# Altium PCB UPS.PcbDoc
Units mm, origin at the board's own origin, x right, y up, seen from the top; angles counter-clockwise.
Board outline 300.74 x 165.61 mm, 2 copper layers (Top Layer, Bottom Layer); 183 components, 101 nets, 505 pads, 1 vias.
Unrouted connection lines stored in the file: 369.
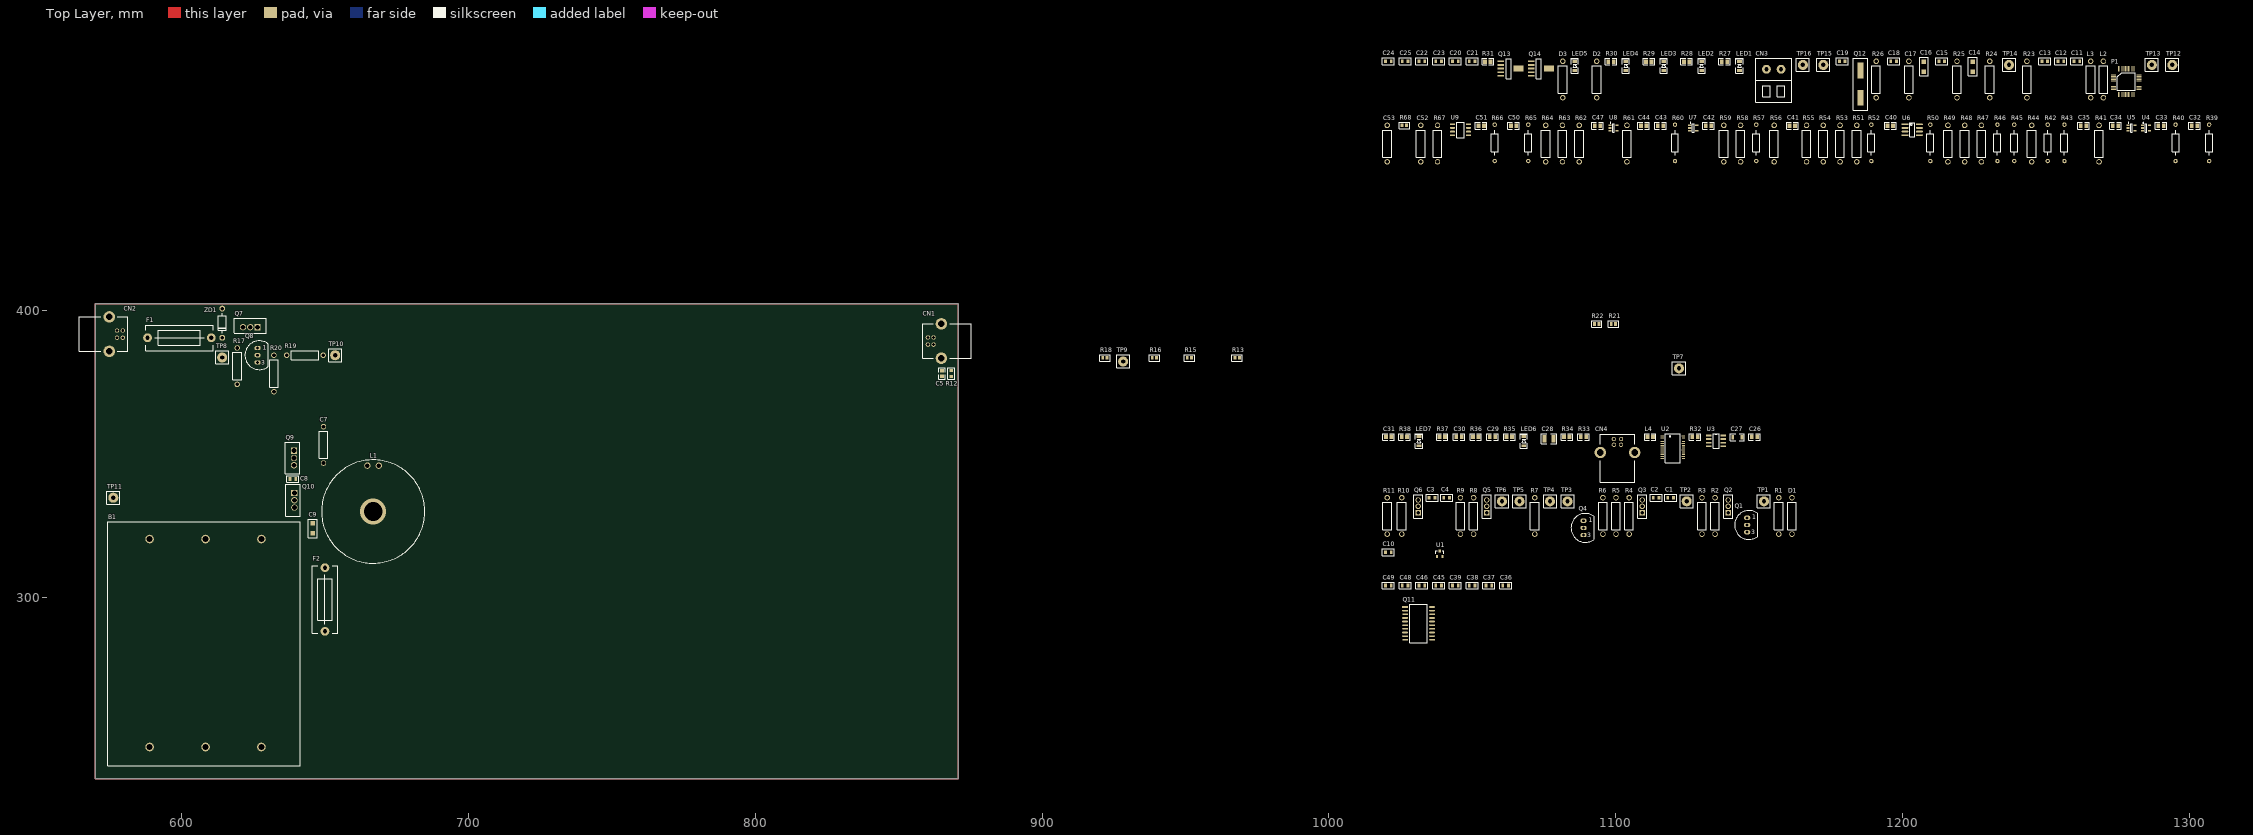
[diagram p0: Top Layer view]
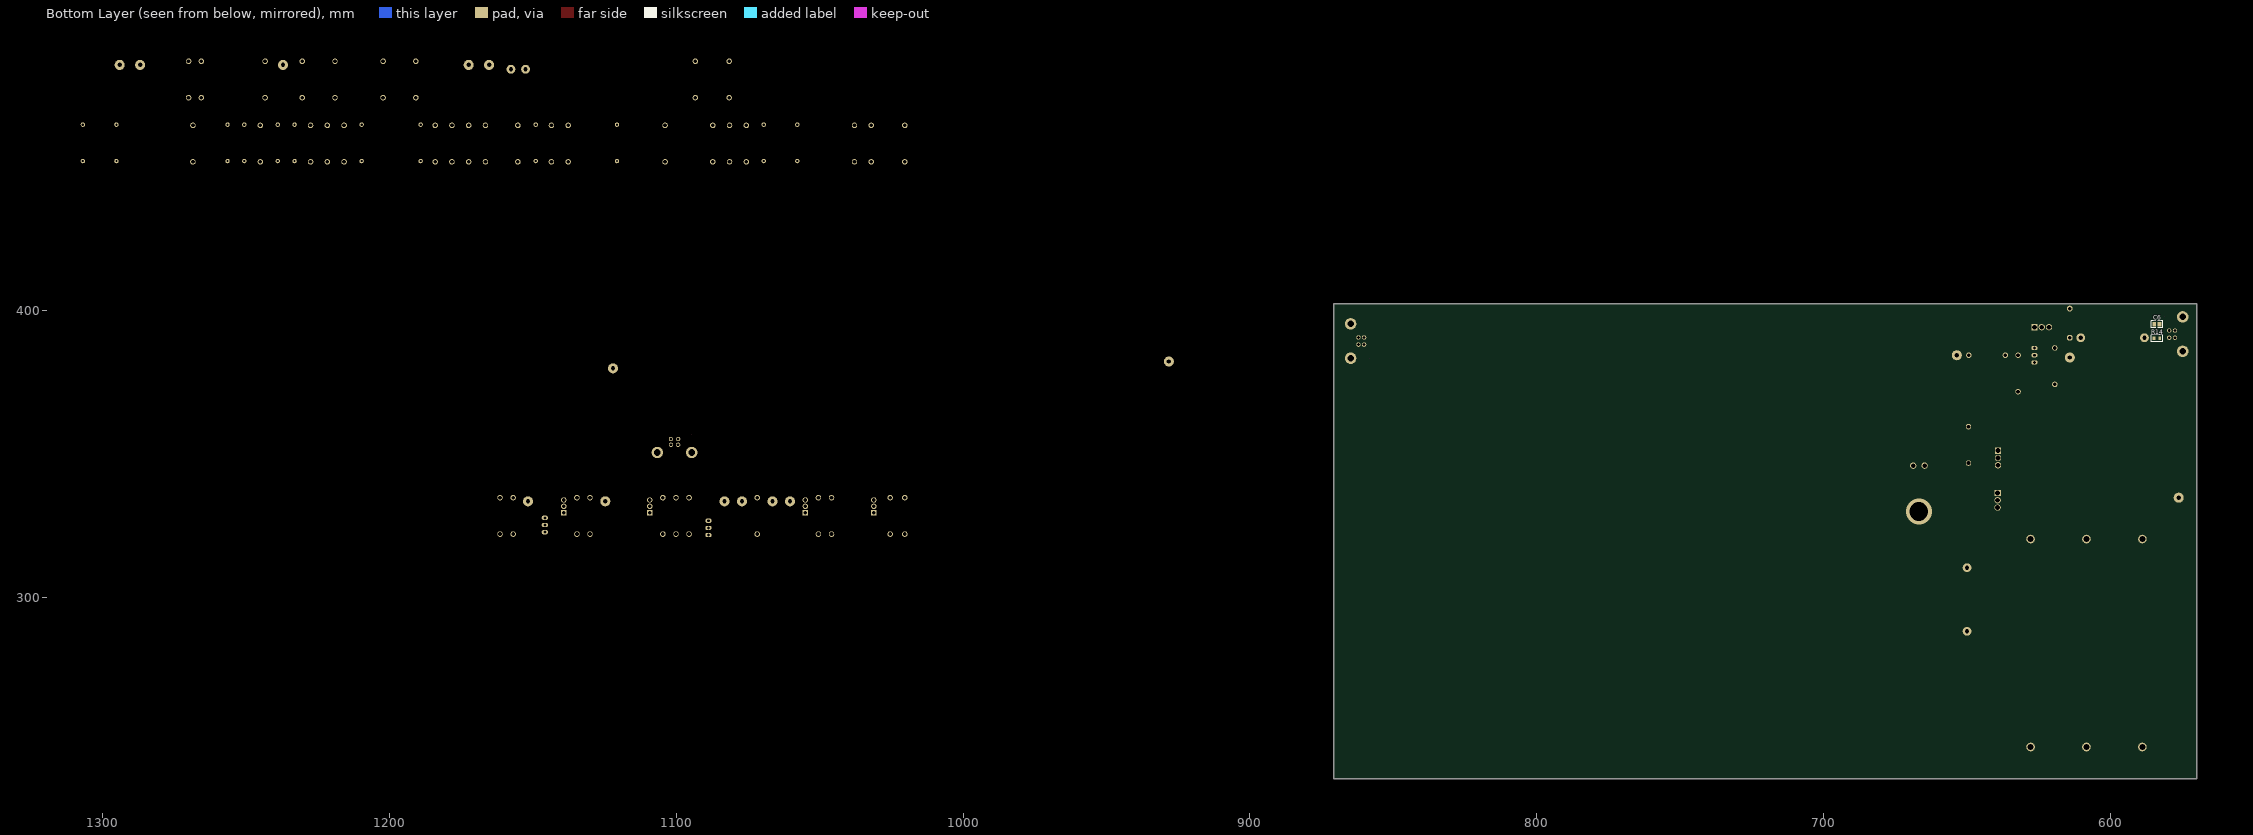
[diagram p1: Bottom Layer view, seen from below]

## Layer stack, top to bottom
Top Solder: solder mask 0.0102, Solder Resist, Dk 3.5
Top Layer: signal copper 0.0356
Dielectric 1: dielectric 0.32, FR-4, Dk 4.8
Bottom Layer: signal copper 0.0356
Bottom Solder: solder mask 0.0102, Solder Resist, Dk 3.5

## Board outline
569.976,236.601 569.976,402.209 870.712,402.209 870.712,236.601

## Design rules (kind name [scope] priority, off if disabled: settings)
Clearance Clearance_poly [All vs InPolygon] p1: gap=0.5
Clearance [All] p2: gap=0.25
HoleSize [All] p1: absolutevalues=TRUE maxlimit=8 minlimit=0.3 maxpercent=80.000 minpercent=20.000
MinimumAnnularRing [All] p1: minimumring=0.2
MinimumSolderMaskSliver [All] p1: minsoldermaskwidth=0.2
PlaneClearance [All] p1: clearance=1.5
PlaneConnect [All] p1: planeconnectstyle=Relief reliefexpansion=0.5 reliefentries=4 reliefconductorwidth=0.3 reliefairgap=0.5
PolygonConnect PolygonConnect_3 [All vs IsNamedPolygon('U14_cooler_top') Or  IsNamedPolygon('U14_cooler_bottom')] p1: connectstyle=Direct reliefconductorwidth=0.254 reliefentries=4 polygonreliefangle="90 Angle" airgapwidth=0.254
PolygonConnect PolygonConnect_2 [All vs IsNamedPolygon('U13_cooler_bottom')] p2: connectstyle=Direct reliefconductorwidth=0.254 reliefentries=4 polygonreliefangle="90 Angle" airgapwidth=0.254
PolygonConnect PolygonConnect_1 [All vs IsNamedPolygon('U13_cooler_top')] p3: connectstyle=Direct reliefconductorwidth=0.254 reliefentries=4 polygonreliefangle="90 Angle" airgapwidth=0.254
PolygonConnect [All] p4: connectstyle=Relief reliefconductorwidth=0.3 reliefentries=4 polygonreliefangle="90 Angle" airgapwidth=0.5
RoutingVias [All] p1: holewidth=0.7 width=1.27 viastyle="Through Hole" minholewidth=0.7 minwidth=1.27 maxholewidth=1 maxwidth=1.5
SilkToBoardRegionClearance [Hide='False'] p1 off:
SilkToSilkClearance [All] p1 off: silktosilkclearance=0.254
SilkToSolderMaskClearance [IsPad] p1 off: minsilkscreentomaskgap=0.254 clearancetoexposedcopper=TRUE
SolderMaskExpansion [All] p1: expansion=0.02
Width [All] p1: maxlimit=5 minlimit=0.254 preferedwidth=0.254
23 further rules are at their usual default settings.

## Classes and differential pairs
component class Processor: C11 C12 C13 C14 C15 C16 C17 C18 C19 C20 C21 C22 C23 C24 C25 CN3 D2 D3 L2 L3 LED1 LED2 LED3 LED4 LED5 P1 Q12 Q13 Q14 R23 R24 R25 R26 R27 R28 R29 R30 R31 TP12 TP13 TP14 TP15 TP16
component class Mérések: *1 C32 C33 C34 C35 C36 C37 C38 C39 C40 C41 C42 C43 C44 C45 C46 C47 C48 C49 C50 C51 C52 C53 R39 R40 R41 R42 R43 R44 R45 R46 R47 R48 R49 R50 R51 R52 R53 R54 R55 R56 R57 R58 R59 R60 R61 R62 R63 R64 R65 R66 R67 R68 U4 U5 U6 U7 U8
component class Fokör: B1 C5 C6 C7 C8 C9 CN1 CN2 F1 F2 L1 Q7 Q8 Q9 Q10 R12 R13 R14 R15 R16 R17 R18 R19 R20 R21 R22 TP7 TP8 TP9 TP10 TP11 ZD1
component class FTDI: C26 C27 C28 C29 C30 C31 CN4 L4 LED6 LED7 R32 R33 R34 R35 R36 R37 R38 U2 U3
component class "Fet meghajtó": C1 C2 C3 C4 D1 Q1 Q2 Q3 Q4 Q5 Q6 R1 R2 R3 R4 R5 R6 R7 R8 R9 R10 R11 TP1 TP2 TP3 TP4 TP5 TP6
component class "Buffer driver": C10 Q11 U1

## Components (designator, comment, footprint, x,y, rotation, side; value= is the part's Value field where it differs from the comment)
B1 "BAT" Elemtarto_3rekesz 577.85,244.729 r0 top
C1 "100nF" FP_0805_CAP_085 1119.124,334.645 r0 top
C2 "100nF" FP_0805_CAP_085 1114.044,334.645 r0 top
C3 "100nF" FP_0805_CAP_085 1035.939,334.645 r0 top
C4 "100nF" FP_0805_CAP_085 1041.019,334.645 r0 top
C5 "4n7 50V X7R" 0805_C 865.124,377.952 r270 top
C6 "4n7 50V X7R" 0805_C 583.819,395.097 r0 bottom
C7 "5600uF" AXIAL-0.3 649.478,353.06 r270 top
C8 "10uF" FP_0805_CAP_085 638.81,341.122 r180 top
C9 "47uF" FP_1206_CAP_125 645.795,323.977 r270 top
C10 "100nF" FP_0805_CAP_085 1020.699,315.595 r0 top
C11 "100nF" FP_0805_CAP_085 1260.729,486.791 r0 top
C12 "10uF" FP_0805_CAP_085 1255.141,486.791 r0 top
C13 "10uF" FP_0805_CAP_085 1249.553,486.791 r0 top
C14 "1u2" FP_1206_CAP_125 1224.407,484.886 r90 top
C15 "100nF" FP_0805_CAP_085 1213.612,486.791 r0 top
C16 "1u2" FP_1206_CAP_125 1207.389,484.886 r90 top
C17 "1nF" AXIAL-0.3 1202.182,480.441 r90 top
C18 "22pF" FP_0805_CAP_085 1196.848,486.791 r0 top
C19 "22pF" FP_0805_CAP_085 1178.941,486.791 r0 top
C20 "100nF" FP_0805_CAP_085 1044.067,486.791 r0 top
C21 "1uF" FP_0805_CAP_085 1049.909,486.791 r0 top
C22 "10uF" FP_0805_CAP_085 1032.383,486.791 r0 top
C23 "10uF" FP_0805_CAP_085 1038.225,486.791 r0 top
C24 "10nF" FP_0805_CAP_085 1020.699,486.791 r0 top
C25 "10nF" FP_0805_CAP_085 1026.541,486.791 r0 top
C26 "100nF 50V" 0805_C 1148.334,355.854 r0 top
C27 "10uF 25V" 1206_C 1142.365,355.727 r0 top
C28 "10nF 10% 25V X7R" 1210_C 1076.706,355.219 r0 top
C29 "100nF 50V" 0805_C 1057.021,355.854 r0 top
C30 "4n7 50V X7R" 0805_C 1045.337,355.854 r0 top
C31 "100nF 50V" 0805_C 1020.826,355.854 r0 top
C32 "330pF 50V NP0" 0805_C 1301.75,464.312 r0 top
C33 "330pF 50V NP0" 0805_C 1290.066,464.312 r0 top
C34 "100nF 50V" 0805_C 1274.191,464.312 r0 top
C35 "100nF 50V" 0805_C 1263.015,464.312 r0 top
C36 "1n 50V NP0" FP_0805_CAP_085 1061.593,304.038 r0 top
C37 "1n 50V NP0" FP_0805_CAP_085 1055.751,304.038 r0 top
C38 "1n 50V NP0" FP_0805_CAP_085 1049.909,304.038 r0 top
C39 "1n 50V NP0" FP_0805_CAP_085 1044.067,304.038 r0 top
C40 "330pF 50V NP0" 0805_C 1195.705,464.312 r0 top
C41 "330pF 50V NP0" 0805_C 1161.542,464.312 r0 top
C42 "330pF 50V NP0" 0805_C 1132.332,464.312 r0 top
C43 "330pF 50V NP0" 0805_C 1115.568,464.312 r0 top
C44 "100nF 50V" 0805_C 1109.726,464.312 r0 top
C45 "1n 50V NP0" FP_0805_CAP_085 1038.225,304.038 r0 top
C46 "1n 50V NP0" FP_0805_CAP_085 1032.383,304.038 r0 top
C47 "100nF 50V" 0805_C 1093.597,464.312 r0 top
C48 "1n 50V NP0" FP_0805_CAP_085 1026.541,304.038 r0 top
C49 "1n 50V NP0" FP_0805_CAP_085 1020.699,304.038 r0 top
C50 "330pF 50V NP0" 0805_C 1064.387,464.312 r0 top
C51 "330pF 50V NP0" 0805_C 1053.084,464.312 r0 top
C52 "100nF" AXIAL-0.3 1032.002,458.089 r90 top
C53 "500pF" AXIAL-0.3 1020.318,458.089 r90 top
CN1 "USB-B-04PFHTW" USB-B 860.171,389.255 r90 top
CN2 "USB-B-04PFHTW" USB-B 579.501,391.668 r270 top
CN3 "Dugos Sorkapocs 2" "Dugos_sorkapocs 2" 1152.525,483.997 r0 top
CN4 "USB-B-04PFHTW" USB-B 1100.582,355.092 r0 top
D1 "1N5819" AXIAL-0.3 1161.415,328.295 r90 top
D2 "1N5819" AXIAL-0.3 1093.343,480.441 r90 top
D3 "1N5819" AXIAL-0.3 1081.532,480.441 r90 top
F1 "3A \"F\"" BIZTOSITO_5X20 610.362,390.398 r180 top
F2 "5A \"F\"" BIZTOSITO_5X20 649.986,288.036 r90 top
L1 "86uH" toroid 668.782,345.821 r180 top
L2 "10uH" AXIAL-0.3 1270,480.441 r90 top
L3 "10uH" AXIAL-0.3 1265.555,480.441 r90 top
L4 "220ohm/100MHz, 0.08R (2A)" 0805_R 1112.012,355.854 r0 top
LED1 "RED" 1206_LED_R 1143.127,485.14 r90 top
LED2 "GRE" 1206_LED_G 1129.919,485.14 r90 top
LED3 "RED" 1206_LED_R 1116.711,485.14 r90 top
LED4 "GRE" 1206_LED_G 1103.503,485.14 r90 top
LED5 "GRE" 1206_LED_G 1085.723,485.14 r90 top
LED6 "RED" 1206_LED_R 1067.943,354.33 r90 top
LED7 "GRE" 1206_LED_G 1031.367,354.33 r90 top
P1 "TMS320F28027" S-PQFP48 1277.874,479.806 r0 top
Q1 "BC556" TO-92 1145.794,325.12 r0 top
Q2 "BD139" TO-32 1139.19,329.438 r90 top
Q3 "BD140" TO-32 1109.218,329.438 r90 top
Q4 "BC546" TO-92 1088.771,324.104 r0 top
Q5 "BD139" TO-32 1054.989,329.438 r90 top
Q6 "BD140" TO-32 1031.113,329.438 r90 top
Q7 "IRF9530N" TO-220-AB 626.491,394.081 r180 top
Q8 "BC546" TO-92 626.491,384.302 r0 top
Q9 "IRL7833" TO-220-AB 639.191,351.028 r270 top
Q10 "IRL7833" TO-220-AB 639.318,336.296 r270 top
Q11 "SN74LVC244A" SOP20 1026.541,296.545 r0 top
Q12 "HC49/4HSMX" Crystal_10MHz 1185.291,478.79 r90 top
Q13 "TPS73633DCQR" TPS73633 1059.942,484.251 r0 top
Q14 "TPS73633DCQR" TPS73633 1070.483,484.251 r0 top
R1 "1K" AXIAL-0.3 1156.843,328.295 r90 top
R2 "1K5" AXIAL-0.3 1134.618,328.295 r90 top
R3 "2" AXIAL-0.3 1130.046,328.295 r90 top
R4 "10K" AXIAL-0.3 1104.646,328.295 r90 top
R5 "1K" AXIAL-0.3 1100.074,328.295 r90 top
R6 "2K2" AXIAL-0.3 1095.502,328.295 r90 top
R7 "10K" AXIAL-0.3 1071.753,328.295 r90 top
R8 "2K2" AXIAL-0.3 1050.417,328.295 r90 top
R9 "2" AXIAL-0.3 1045.845,328.295 r90 top
R10 "10K" AXIAL-0.3 1025.398,328.295 r90 top
R11 "10K" AXIAL-0.3 1020.318,328.295 r90 top
R12 "1M" FP_0805_RES 868.299,377.952 r90 top
R13 "0" FP_0805_0ohm 967.994,383.413 r0 top
R14 "1M" FP_0805_RES 583.819,390.271 r180 bottom
R15 "0" FP_0805_0ohm 951.357,383.413 r0 top
R16 "0" FP_0805_0ohm 939.165,383.413 r0 top
R17 "10K" AXIAL-0.3 619.379,380.492 r270 top
R18 "0" FP_0805_0ohm 921.893,383.413 r0 top
R19 "2K2" AXIAL-0.3 643.001,384.302 r180 top
R20 "10K" AXIAL-0.3 632.206,377.952 r90 top
R21 "0" FP_0805_0ohm 1099.185,395.224 r0 top
R22 "0" FP_0805_0ohm 1093.343,395.224 r0 top
R23 "3K3" AXIAL-0.3 1243.33,480.441 r90 top
R24 "3K3" AXIAL-0.3 1230.376,480.441 r90 top
R25 "100K" AXIAL-0.3 1218.946,480.441 r90 top
R26 "1M" AXIAL-0.3 1190.752,480.441 r90 top
R27 "390R" 0805_R 1137.92,486.664 r0 top
R28 "390R" 0805_R 1124.712,486.664 r0 top
R29 "390R" 0805_R 1111.504,486.664 r0 top
R30 "390R" 0805_R 1098.296,486.664 r0 top
R31 "390R" 0805_R 1055.37,486.664 r0 top
R32 "4K70 5%" 0805_R 1127.633,355.854 r0 top
R33 "33R0 5%" 0805_R 1088.771,355.854 r0 top
R34 "33R0 5%" 0805_R 1082.929,355.854 r0 top
R35 "390R" 0805_R 1062.863,355.854 r0 top
R36 "10K0  1%" 0805_R 1051.179,355.854 r0 top
R37 "1M" 0805_R 1039.495,355.854 r0 top
R38 "390R" 0805_R 1026.287,355.854 r0 top
R39 "3k3 1%" RES_AXIAL_D95_L250_RM500 1306.83,458.343 r90 top
R40 "3k3 1%" RES_AXIAL_D95_L250_RM500 1295.146,458.343 r90 top
R41 "5K6" AXIAL-0.3 1268.476,458.089 r90 top
R42 "2k7 1%" RES_AXIAL_D95_L250_RM500 1250.569,458.343 r90 top
R43 "1K8 1%" RES_AXIAL_D95_L250_RM500 1256.411,458.343 r90 top
R44 "5K6" AXIAL-0.3 1244.981,458.089 r90 top
R45 "2k7 1%" RES_AXIAL_D95_L250_RM500 1238.885,458.343 r90 top
R46 "1k8 1%" RES_AXIAL_D95_L250_RM500 1233.043,458.343 r90 top
R47 "3K3" AXIAL-0.3 1227.455,458.089 r90 top
R48 "2K5" AXIAL-0.3 1221.613,458.089 r90 top
R49 "10K" AXIAL-0.3 1215.771,458.089 r90 top
R50 "3k3 1%" RES_AXIAL_D95_L250_RM500 1209.675,458.343 r90 top
R51 "3K" AXIAL-0.3 1184.021,458.089 r90 top
R52 "3k3 1%" RES_AXIAL_D95_L250_RM500 1189.101,458.343 r90 top
R53 "3K3" AXIAL-0.3 1178.179,458.089 r90 top
R54 "3K3" AXIAL-0.3 1172.337,458.089 r90 top
R55 "2K7" AXIAL-0.3 1166.495,458.089 r90 top
R56 "10K" AXIAL-0.3 1155.192,458.089 r90 top
R57 "3k3 1%" RES_AXIAL_D95_L250_RM500 1148.969,458.343 r90 top
R58 "3K3" AXIAL-0.3 1143.508,458.089 r90 top
R59 "3K3" AXIAL-0.3 1137.666,458.089 r90 top
R60 "10K" RES_AXIAL_D95_L250_RM500 1120.648,458.343 r90 top
R61 "5K6" AXIAL-0.3 1103.884,458.089 r90 top
R62 "5K6" AXIAL-0.3 1087.247,458.089 r90 top
R63 "5K" AXIAL-0.3 1081.405,458.089 r90 top
R64 "5K" AXIAL-0.3 1075.563,458.089 r90 top
R65 "3k3 1%" RES_AXIAL_D95_L250_RM500 1069.467,458.343 r90 top
R66 "10K" RES_AXIAL_D95_L250_RM500 1057.783,458.343 r90 top
R67 "3K3" AXIAL-0.3 1037.844,458.089 r90 top
R68 "0" FP_0805_0ohm 1026.287,464.439 r0 top
TP1 "Testpoint" TESTPOINT_1.5 1151.636,333.375 r0 top
TP2 "Testpoint" TESTPOINT_1.5 1124.712,333.375 r0 top
TP3 "Testpoint" TESTPOINT_1.5 1083.183,333.375 r0 top
TP4 "Testpoint" TESTPOINT_1.5 1077.087,333.375 r0 top
TP5 "Testpoint" TESTPOINT_1.5 1066.419,333.375 r0 top
TP6 "Testpoint" TESTPOINT_1.5 1060.323,333.375 r0 top
TP7 "Testpoint" TESTPOINT_1.5 1122.045,379.73 r0 top
TP8 "Testpoint" TESTPOINT_1.5 614.172,383.54 r0 top
TP9 "Testpoint" TESTPOINT_1.5 928.243,382.143 r0 top
TP10 "Testpoint" TESTPOINT_1.5 653.542,384.302 r0 top
TP11 "Testpoint" TESTPOINT_1.5 576.199,334.645 r0 top
TP12 "Testpoint" TESTPOINT_1.5 1294.003,485.521 r0 top
TP13 "Testpoint" TESTPOINT_1.5 1286.891,485.521 r0 top
TP14 "Testpoint" TESTPOINT_1.5 1237.107,485.521 r0 top
TP15 "Testpoint" TESTPOINT_1.5 1172.337,485.521 r0 top
TP16 "Testpoint" TESTPOINT_1.5 1165.225,485.521 r0 top
U1 "MCP120" "SOT-23 - 3" 1038.606,315.087 r0 top
U2 "FT232RL" SSOP-28 1119.886,351.917 r0 top
U3 "USB6B1" SO-8 1134.999,354.457 r0 top
U4 "FAN4174IS5X" SOT-23-5 1284.859,463.55 r0 top
U5 "FAN4174IS5X" SOT-23-5 1279.779,463.55 r0 top
U6 "LM2903D" FP_SO8_MS012AA 1203.325,462.915 r0 top
U7 "FAN4174IS5X" SOT-23-5 1126.998,463.55 r0 top
U8 "FAN4174IS5X" SOT-23-5 1099.185,463.55 r0 top
U9 "ASC711" SOP8 1043.051,464.82 r0 top
ZD1 "BZX85C5V6" DO-41-400 614.172,390.398 r90 top

## Footprints (in the part's own frame and the unit in brackets; to place one, negate y for a bottom-side part, rotate by r counter-clockwise, add the part's x,y. Pads: shape width x height; smd on the part's side, far side on the other; paste and mask are expansions set on the pad)
0805_C [mm]
  rect 1.3x1.5 smd: 1(-0.95,0) 2(0.95,0)
  silkscreen extent -2,-1.15 2,1.15, body extent -1,-0.68 1,0.67, height 0.55
0805_R [mm]
  rect 1.3x1.5 smd: 1(-0.95,0) 2(0.95,0)
  silkscreen extent -2,-1.15 2,1.15, body extent -1,-0.67 1,0.68, height 0.55
1206_C [mil]
  rect 40x65 smd: 1(-62.5,0) 2(62.5,0)
  silkscreen extent -98,-49 98,49, body extent -61,-32 61,32, height 25
1206_LED_G [mil]
  rect 40x65 smd: 1(-62.5,0) 2(62.5,0)
  silkscreen extent -98,-49 105,49, body extent -63,-33 63,33, height 45
1206_LED_R [mil]
  rect 40x65 smd: 1(-62.5,0) 2(62.5,0)
  silkscreen extent -98,-49 105,49, body extent -63,-33 63,33, height 45
1210_C [mm]
  rect 1.4x2.7 smd: 1(-1.5,0) 2(1.5,0)
  silkscreen extent -2.67,-1.78 2.67,1.78, body extent -1.6,-1.25 1.6,1.25, height 1.3
AXIAL-0.3 [mm] "Axial Device, Thru-Hole; 2 Leads; 0.3 in Pin Spacing"
  round 1.9 hole 1.3: 1(-6.35,0) 2(6.35,0)
  silkscreen extent -4.83,-1.52 4.72,1.52
BIZTOSITO_5X20 [mil]
  round 120 hole 60: 1(0,0) 2(875,0)
  silkscreen extent -25,-175 900,175
Crystal_10MHz [mm]
  rect 5.5x2 smd: 1(-4.75,0) 2(4.75,0)
  silkscreen extent -9,-2.5 9,2.5
DO-41-400 [mil]
  round 80 hole 48: 1(400,0) 2(0,0)
  silkscreen extent 63,-53 335,53, body extent -17,-53 417,55, height 129
"Dugos_sorkapocs 2" [mil]
  round 120 hole 60: 1(0,0) 2(200,0)
  silkscreen extent -150,-450 350,150
Elemtarto_3rekesz [mm]
  round 3 hole 2: 1(11,3) 2(30.5,3) 3(50,3) 4(11,75.5) 5(30.5,75.5) 6(50,75.5)
  silkscreen extent -3.5,-3.5 63.5,81.5
FP_0805_0ohm [mm] "0805 power inductor"
  rect 1x1.3 smd: 1(-0.762,0) 2(0.762,0)
  silkscreen extent -1.81,-1.2 1.81,1.13, body extent -1,-0.64 1.03,0.64, height 1.25
FP_0805_CAP_085 [mm] "0805 kapacitás YAGEO 0.85mm magas"
  rect 1x1.3 smd: 1(-1,0) 2(1,0)
  silkscreen extent -2.07,-1.19 2.08,1.16, body extent -1,-0.64 1.03,0.64, height 0.85
FP_0805_RES [mm] "0805 ellenállás"
  rect 1x1.3 smd: 1(-1,0) 2(1,0)
  silkscreen extent -2.03,-1.2 2.06,1.19, body extent -1,-0.62 1,0.63, height 0.62
FP_1206_CAP_125 [mm] "1206 kapacitás 1.25 mm"
  rect 1.6x1.6 smd: 1(-1.7,0) 2(1.7,0)
  silkscreen extent -3.19,-1.57 3.23,1.46, body extent -1.52,-0.79 1.58,0.79, height 1.25
FP_SO8_MS012AA [mm] "SO8 JEDEC MS-012AA, Analog Devices R-8, SO8-SOT96-1, NS M08A"
  rect 2.4x0.6 smd: 1(-2.5,1.905)
  oval 2.4x0.6 smd: 2(-2.5,0.635) 3(-2.5,-0.635) 4(-2.5,-1.905) 5(2.5,-1.905) 6(2.5,-0.635) 7(2.5,0.635) 8(2.5,1.905)
  silkscreen extent -0.9,-2.5 0.9,2.5, body extent -3.03,-2.5 3.03,2.5, height 1.9
RES_AXIAL_D95_L250_RM500 [mil] "Ellenállás D = 2.4 mm  Testhossz = 6.3 mm  Raszter = 12.7 mm"
  round 60 hole 32: 1(-250,0) 2(250,0)
  silkscreen extent -170,-48 170,48
S-PQFP48 [mm]
  oval 0.22x1.8 smd: 1(-2.67,-4.6)
  rect 0.22x1.8 smd: 2(-2.17,-4.6) 3(-1.67,-4.6) 4(-1.17,-4.6) 5(-0.67,-4.6) 6(-0.17,-4.6) 7(0.33,-4.6) 8(0.83,-4.6) 9(1.33,-4.6) 10(1.83,-4.6) 11(2.33,-4.6) 12(2.83,-4.6) 25(2.83,4.4) 26(2.33,4.4) 27(1.83,4.4) 28(1.33,4.4) 29(0.83,4.4) 30(0.33,4.4) 31(-0.17,4.4) 32(-0.67,4.4) 33(-1.17,4.4) 34(-1.67,4.4) 35(-2.17,4.4) 36(-2.67,4.4)
  rect 1.8x0.22 smd: 13(4.58,-2.85) 14(4.58,-2.35) 15(4.58,-1.85) 16(4.58,-1.35) 17(4.58,-0.85) 18(4.58,-0.35) 19(4.58,0.15) 20(4.58,0.65) 21(4.58,1.15) 22(4.58,1.65) 23(4.58,2.15) 24(4.58,2.65) 37(-4.42,2.65) 38(-4.42,2.15) 39(-4.42,1.65) 40(-4.42,1.15) 41(-4.42,0.65) 42(-4.42,0.15) 43(-4.42,-0.35) 44(-4.42,-0.85) 45(-4.42,-1.35) 46(-4.42,-1.85) 47(-4.42,-2.35) 48(-4.42,-2.85)
  silkscreen extent -2.99,-3.17 3.14,2.96, body extent -4.44,-4.61 4.58,4.41, height 1.45
SO-8 [mm]
  rect 1.905x0.635 smd: 1(-2.54,1.905) 2(-2.54,0.635) 3(-2.54,-0.635) 4(-2.54,-1.905) 5(2.54,-1.905) 6(2.54,-0.635) 7(2.54,0.635) 8(2.54,1.905)
  silkscreen extent -1,-2.54 1.1,2.54, body extent -3,-2.45 3,2.45, height 1.75
SOP8 [mm]
  rect 1.75x0.65 smd: 1(0,0)
  oval 1.75x0.65 smd: 2(0,-1.27) 3(0,-2.54) 4(0,-3.81) 5(5.6,-3.81) 6(5.6,-2.54) 7(5.6,-1.27) 8(5.6,0)
  silkscreen extent 1.55,-4.62 4.16,0.75
SOP20 [mm]
  rect 2x0.6 smd: 1(0,0)
  oval 2x0.6 smd: 2(0,-1.27) 3(0,-2.54) 4(0,-3.81) 5(0,-5.08) 6(0,-6.35) 7(0,-7.62) 8(0,-8.89) 9(0,-10.16) 10(0,-11.43) 11(9.4,-11.43) 12(9.4,-10.16) 13(9.4,-8.89) 14(9.4,-7.62) 15(9.4,-6.35) 16(9.4,-5.08) 17(9.4,-3.81) 18(9.4,-2.54) 19(9.4,-1.27) 20(9.4,0)
  silkscreen extent 1.56,-12.45 7.81,1.03, body extent -0.51,-12.11 9.81,0.69, height 2.49
"SOT-23 - 3" [mil]
  rect 32x42 smd: 1(-37.4,-40) 2(37.4,-40) 3(0,40)
  silkscreen extent -52,0 52,40, body extent -57,-46 58,46, height 39
SOT-23-5 [mm] "SOT23, 5-Leads, Texas Instruments"
  rect 1.1x0.6 smd: 1(-1.2,0.95) 2(-1.2,0) 3(-1.2,-0.95) 4(1.2,-0.95) 5(1.2,0.95)
  silkscreen extent -1.13,-1.5 0.28,1.9, body extent -1.17,-1.46 1.14,1.46, height 0.98
SSOP-28 [mm] "FTDI Chip"
  oval 1.2x0.3 smd: 1(-3.7,4.225) 2(-3.7,3.575) 3(-3.7,2.925) 4(-3.7,2.275) 5(-3.7,1.625) 6(-3.7,0.975) 7(-3.7,0.325) 8(-3.7,-0.325) 9(-3.7,-0.975) 10(-3.7,-1.625) 11(-3.7,-2.275) 12(-3.7,-2.925) 13(-3.7,-3.575) 14(-3.7,-4.225) 15(3.7,-4.225) 16(3.7,-3.575) 17(3.7,-2.925) 18(3.7,-2.275) 19(3.7,-1.625) 20(3.7,-0.975) 21(3.7,-0.325) 22(3.7,0.325) 23(3.7,0.975) 24(3.7,1.625) 25(3.7,2.275) 26(3.7,2.925) 27(3.7,3.575) 28(3.7,4.225)
  silkscreen extent -2.6,-5.1 2.6,5.1
TESTPOINT_1.5 [mm] "2mm-es tesztpont 1mm-es furattal"
  round 3.5 hole 1.5: 1(0,0)
  silkscreen extent -2.29,-2.29 2.29,2.29, body extent -1.13,-1.13 1.13,1.13
TO-32 [mm]
  rect 1.9x1.9 hole 1.3: 1(0,0)
  round 1.9 hole 1.3: 2(2.2,0) 3(4.4,0)
  silkscreen extent -1.95,-1.55 6.17,1.58
TO-92 [mm] "TO, Flat Index; 3 In-Line, Axial Leads; Body Dia. 4.6mm; Leads 0.41 x 0.39 mm (max)"
  oval 2.2x1.5 hole 1: 1(0,2.5) 2(0,0) 3(0,-2.5)
  silkscreen extent -4.4,-4.99 3.51,5.01
TO-220-AB [mm] "TO, Thru-Hole, Vertical, Heatsink Mounted; 3 In-Line Leads; Pitch 3.81 mm"
  rect 2.2x2.2 hole 1.7: 1(0,0)
  round 2.2 hole 1.7: 2(2.54,0) 3(5.08,0)
  silkscreen extent -2.95,-3.06 8.06,2.05, body extent -2.71,-2.85 7.79,1.85, height 2.25
toroid [mm]
  round 2.2 hole 1.5: 1(0,0) 2(4,0)
  silkscreen extent -16,-2 20,34
TPS73633 [mm]
  rect 2.2x0.6 smd: 1(0,2.54) 2(0,1.27) 3(0,0) 4(0,-1.27) 5(0,-2.54)
  rect 3.5x2.2 smd: 6(6.2,0)
  silkscreen extent 1.86,-3.56 3.59,3.48
USB-B [mm]
  round 4 hole 2.3: 0(-6,-4.7) 0(6,-4.7)
  round 1.5 hole 1: 1(1.25,0) 2(-1.25,0) 3(-1.25,-2) 4(1.25,-2)
  Top Layer lines w0.2: -6,1.7 -6,1.7
  silkscreen extent -6,-15.1 6,1.7, body extent -7.44,-15 7.44,2, height 11

## Part data
C1 C2 C3 C4 C7 C8 C9 C10 C11 C12 C13 C14 C15 C16 C17 C18 C19 C20 C21 C22 C23 C24 C25 C52 C53: library part CAP, "Capacitor"
C5 C6 C26 C27 C28 C29 C30 C31 C32 C33 C34 C35 C40 C41 C42 C43 C44 C47 C50 C51: library part Capacitor_SMD, "SMD kondenzátorok"
C36 C37 C38 C39 C45 C46 C48 C49: library part Capacitor
CN1 CN2 CN4: library part USB-B
CN3: "2 P RM5.08 90° ZÁRT 12A"
D1 D2 D3: library part SCHOTTKY, "NXP - PMEG3020EJ,115 - SCHOTTKY RECT 30V 2A SOD323F"
F1 F2: library part Fuse, "Fuse"
L1 L2 L3: library part IND, "Inductor"
L4: library part "Ferrit Bead", "SMD Ferrit Bead 220ohm/100MHz"
LED1 LED2 LED3 LED4 LED5 LED6 LED7: library part LED, "LED"
P1: "Processor"
Q1 Q3 Q6: "PNP tranzisztor"
Q2 Q4 Q5 Q8: "NPN tranzisztor"
Q7: "P-MOSFET"
Q9 Q10: "N-FET"
Q12: "kristály"
Q13 Q14: "proci táp 3V3"
R1 R2 R3 R4 R5 R6 R7 R8 R9 R10 R11 R12 R13 R14 R15 R16 R17 R18 R19 R20 R21 R22 R23 R24 R25 R26 R41 R44 R47 R48 R49 R51 R53 R54 R55 R56 R58 R59 R61 R62 R63 R64 R67 R68: library part RES, "Resistor"
R27 R28 R29 R30 R31 R32 R33 R34 R35 R36 R37 R38 R39 R40 R42 R43 R45 R46 R50 R52 R57 R60 R65 R66: library part Resistor
U1: "Voltage detector"
U2: "USB - UART IC"
U6: "komparátor"
U9: "Áramméro"
ZD1: "Zener Diode 5V6 1.3W DO-41"

## Via types
v1: diameter 9, hole 6.5, Top Layer to Bottom Layer, 1 vias

## Nets (pads, with @x,y where several pads share a name; then routed paths per layer and width w, separated by ;. In a path a pad name is that pad's centre, name@x,y a point inside that pad or via, vN(x,y) a via of type N, cw(c..) or ccw(c..) an arc to the next point about the centre after c; other vN are vias at no path point)
GND: C3.1 C4.1 C5.2 C6.2 C7.2 C8.1 C9.1 C10.1 C11.1 C12.1 C13.1 C14.1 C15.2 C16.1 C17.1 C18.1 C19.1 C20.1 C21.1 C22.1 C23.1 C24.1 C25.1 C26.2 C27.2 C29.2 C30.2 C31.2 C32.2 C33.2 C34.1 C35.1 C36.1 C37.2 C38.1 C39.2 C42.2 C43.2 C44.1 C45.1 C46.2 C47.1 C48.1 C49.2 C52.2 C53.1 CN1.4 CN2.4 P1.2 P1.12 P1.33 P1.34 P1.44 Q4.3 Q6.2 Q8.3 Q10.3 Q11.3 Q11.5 Q11.7 Q11.8 Q11.9 Q11.10 Q11.11 Q11.12 Q11.13 Q11.15 Q11.17 Q13.3 Q13.6 Q14.3 Q14.6 R7.1 R10.1 R11.1 R12.1 R13.1 R14.1 R18.1 R20.1 R23.2 R24.1 R27.1 R28.1 R29.1 R30.1 R31.1 R36.1 R37.2 R39.1 R40.1 R51.1 R53.1 R57.1 R58.1 R59.1 R60.1 R68.1 U1.3 U2.7 U2.18 U2.21 U2.25 U2.26 U3.5 U4.2 U5.2 U6.4 U7.2 U8.2 U9.8 ZD1.1
NetB1_1: B1.1 B1.2 B1.3 R22.1
NetC1_1: C1.1 C2.1 L1.1 Q3.2 Q9.3 Q10.2 R4.1 R5.1 TP4.1
NetC5_1: C5.1 CN1.0 R12.2
NetC6_1: C6.1 CN2.0 R14.2
NetC7_1: C7.1 C8.2 CN1.1 D1.2 Q7.3 Q9.2 R15.2 TP7.1
NetC9_2: C9.2 F2.2 U9.3 U9.4
NetC11_2: C11.2 C12.2 L2.2 P1.35
NetC14_2: C14.2 P1.32
NetC16_2: C16.2 P1.43
NetC17_2: C17.2 P1.3 R25.1
NetC18_2: C18.2 P1.46 Q12.2 R26.2
NetC19_2: C19.2 P1.45 Q12.1 R26.1
NetC24_2: C24.2 Q13.4
NetC25_2: C25.2 Q14.4
NetC28_1: C28.1 CN4.1 L4.1
NetC30_1: C30.1 CN4.0 R37.1
NetC32_1: C32.1 C36.2 R39.2 R41.2 U4.3
NetC33_1: C33.1 R40.2 R42.1 U5.3
NetC37_1: C37.1 C40.1 R44.2 R50.2 U4.4
NetC38_2: C38.2 R42.2 R43.1
NetC39_1: C39.1 R45.2 R46.1
NetC40_2: C40.2 P1.10 R48.2 R50.1 U4.1
NetC41_1: C41.1 R45.1 R52.2 U5.4
NetC41_2: C41.2 P1.9 R52.1 R55.2 U5.1
NetC42_1: C42.1 C45.2 R57.2 R61.2 U7.3
NetC43_1: C43.1 C48.2 R60.2 R63.1 U8.3
NetC46_1: C46.1 C50.1 R62.2 R65.2 U7.4
NetC49_1: C49.1 C51.1 R64.1 R66.2 U8.4
NetC50_2: C50.2 P1.8 R65.1 U7.1
NetC51_2: C51.2 P1.7 R66.1 U8.1
NetC53_2: C53.2 R63.2 U9.6
NetCN2_1: CN2.1 F1.2
NetCN3_1: CN3.1 P1.22 TP15.1
NetCN3_2: CN3.2 P1.23 TP16.1
NetL1_2: L1.2 U9.1 U9.2
NetLED1_1: LED1.1 P1.36
NetLED1_2: LED1.2 R27.2
NetLED2_1: LED2.1 P1.19
NetLED2_2: LED2.2 R28.2
NetLED3_1: LED3.1 P1.20
NetLED3_2: LED3.2 R29.2
NetLED4_1: LED4.1 P1.21
NetLED4_2: LED4.2 R30.2
NetLED5_2: LED5.2 R31.2
NetLED6_1: LED6.1 R35.2
NetLED6_2: LED6.2 U2.23
NetLED7_1: LED7.1 R38.2
NetLED7_2: LED7.2 U2.22
NetP1_1: P1.1 U2.5
NetP1_26: P1.26 R49.1 U6.1
NetP1_27: P1.27 R56.1 U6.7
NetP1_28: P1.28 Q11.4 R23.1 TP12.1
NetP1_29: P1.29 Q11.2 R24.2 TP13.1
NetP1_37: P1.37 Q11.6 TP14.1
NetP1_47: P1.47 R67.1 U9.7
NetP1_48: P1.48 U2.1
NetQ1_1: Q1.1 Q2.3 Q3.1 R5.2
NetQ1_2: Q1.2 R1.2 R2.2
NetQ2_1: Q2.1 Q3.3 R3.1
NetQ4_1: Q4.1 R2.1
NetQ4_2: Q4.2 R6.1 R7.2
NetQ5_1: Q5.1 Q6.3 R9.1
NetQ5_3: Q5.3 Q6.1 R8.1 R11.2
NetQ7_1: Q7.1 Q8.1 R17.1 TP9.1
NetQ8_2: Q8.2 R19.2 R20.2
NetQ9_1: Q9.1 R3.2 R4.2 TP2.1
NetQ10_1: Q10.1 R9.2 R10.2 TP6.1
NetQ11_1: Q11.1 Q11.19 U1.2
NetQ11_14: Q11.14 R19.1 TP10.1
NetQ11_16: Q11.16 R8.2 TP5.1
NetQ11_18: Q11.18 R6.2 TP3.1
NetR13_2: R13.2 R62.1
NetR15_1: R15.1 R41.1
NetR16_1: R16.1 R61.1
NetR18_2: R18.2 R44.1
NetR21_2: R21.2 R43.2
NetR22_2: R22.2 R46.2
NetR33_1: R33.1 U3.7
NetR34_1: R34.1 U3.6
NetR47_1: R47.1 R53.2 U6.3
NetR48_1: R48.1 R51.2 U6.2
NetR54_1: R54.1 R59.2 U6.5
NetR55_1: R55.1 R58.2 U6.6
NetR64_2: R64.2 R68.2
U_BOOT: C1.2 C2.2 D1.1 Q1.3 Q2.2 R1.1 TP1.1
USB_3V: C31.1 U2.17
USB_5V: C26.1 C27.1 R32.2 R35.1 R38.1 U2.4 U2.20 U3.8
USB_D+: CN4.3 U3.2
USB_D-: CN4.2 U3.3
USB_G: C28.2 CN4.4 U3.4
USB_RST: C29.1 R32.1 R36.2 U2.19
USB_V: L4.2 U3.1
USBDN: R34.2 U2.16
USBDP: R33.2 U2.15
VBATT: B1.4 B1.5 B1.6 D3.2 F2.1 R21.1 TP11.1
VCPU: C22.2 C52.1 L2.1 L3.1 LED5.1 Q13.2 R25.2 R49.2 R56.2 R67.2 U1.1 U6.8 U9.5
VDDA: C13.2 C15.1 C34.2 C35.2 C44.2 C47.2 L3.2 P1.11 R47.2 R54.2 U4.5 U5.5 U7.5 U8.5
VDRV: C3.2 C4.2 C20.2 C21.2 D2.1 D3.1 Q5.2 Q13.1 Q13.5 Q14.1 Q14.5
VIN: D2.2 F1.1 Q7.2 R16.2 R17.2 TP8.1 ZD1.2
VMUV: C10.2 C23.2 Q11.20 Q14.2
pads on no net: CN1.2 CN1.3 CN2.2 CN2.3 P1.4 P1.5 P1.6 P1.13 P1.14 P1.15 P1.16 P1.17 P1.18 P1.24 P1.25 P1.30 P1.31 P1.38 P1.39 P1.40 P1.41 P1.42 U2.2 U2.3 U2.6 U2.8 U2.9 U2.10 U2.11 U2.12 U2.13 U2.14 U2.24 U2.27 U2.28
copper on no net: | length 932.7
  Top Layer w0.254: 569.976,236.601 569.976,402.209 870.712,402.209 870.712,236.601 570.357,236.601 569.976,236.601
  other v1: 666.782,329.821

## Text inside footprints (layer, text, board x,y; h text height)
Q1: Top Overlay "3" at 1147.154,321.85 h1.5; Top Overlay "1" at 1147.524,327.06 h1.5
Q4: Top Overlay "3" at 1090.131,320.834 h1.5; Top Overlay "1" at 1090.501,326.044 h1.5
Q8: Top Overlay "3" at 627.851,381.032 h1.5; Top Overlay "1" at 628.221,386.242 h1.5